# EAGLE board ledmatrix (EAGLE 6.5.0)

Size 160 x 100 mm. Coordinates in mm from the lower left corner, seen from the top.
Outline: 0,0 160,0 160,100 0,100 0,0
Copper layers (1*16): Top 0.035mm / dielectric 1.5mm / Bottom 0.035mm
Design rules "default": minimum track width 10mil, minimum drill 24mil, track to track 8mil, track to pad 8mil, pad to pad 8mil, via to via 8mil, smd to smd 8mil, copper to edge 40mil, drill to drill 8mil, minimum pad ring 10mil, minimum via ring 8mil, stop-mask expansion 4mil, vias tented up to drill 0mil, thermal gap 10mil

## Footprints (pad centres in the part's own frame; a part is rotated, then mirrored left to right if it is on the bottom)
LED5MM = drill 0.813 octagon: A -1.27,0; K 1.27,0
0204/7 = drill 0.813 octagon: 1 -3.81,0; 2 3.81,0
MA07-1 = drill 1.016 long: 1 -7.62,0; 2 -5.08,0; 3 -2.54,0; 4 0,0; 5 2.54,0; 6 5.08,0; 7 7.62,0
MA12-1 = drill 1.016 long: 1 -13.97,0; 2 -11.43,0; 3 -8.89,0; 4 -6.35,0; 5 -3.81,0; 6 -1.27,0; 7 1.27,0; 8 3.81,0; 9 6.35,0; 10 8.89,0; 11 11.43,0; 12 13.97,0
TO18 = drill 0.813 octagon: 1 -1.27,-1.27; 2 1.27,-1.27; 3 1.27,1.27

## Placement (x,y rotation side)
LED1  [LED5MM]  -73.66,72.39 0 top  (outside the outline)
LED2  [LED5MM]  -86.36,72.39 0 top  (outside the outline)
LED3  [LED5MM]  -99.06,72.39 0 top  (outside the outline)
LED4  [LED5MM]  -21.59,80.01 0 top  (outside the outline)
LED5  [LED5MM]  -34.29,80.01 0 top  (outside the outline)
LED6  [LED5MM]  -46.99,80.01 0 top  (outside the outline)
LED7  [LED5MM]  -59.69,80.01 0 top  (outside the outline)
LED8  [LED5MM]  -72.39,80.01 0 top  (outside the outline)
LED9  [LED5MM]  -85.09,80.01 0 top  (outside the outline)
LED10  [LED5MM]  -73.66,3.81 0 top  (outside the outline)
LED11  [LED5MM]  -60.96,72.39 0 top  (outside the outline)
LED12  [LED5MM]  -86.36,3.81 0 top  (outside the outline)
LED13  [LED5MM]  -99.06,3.81 0 top  (outside the outline)
LED14  [LED5MM]  -22.86,11.43 0 top  (outside the outline)
LED15  [LED5MM]  -35.56,11.43 0 top  (outside the outline)
LED16  [LED5MM]  -48.26,11.43 0 top  (outside the outline)
LED17  [LED5MM]  -60.96,11.43 0 top  (outside the outline)
LED18  [LED5MM]  -73.66,11.43 0 top  (outside the outline)
LED19  [LED5MM]  -86.36,11.43 0 top  (outside the outline)
LED20  [LED5MM]  -99.06,11.43 0 top  (outside the outline)
LED21  [LED5MM]  -22.86,19.05 0 top  (outside the outline)
LED22  [LED5MM]  -35.56,19.05 0 top  (outside the outline)
LED23  [LED5MM]  -48.26,19.05 0 top  (outside the outline)
LED24  [LED5MM]  -60.96,19.05 0 top  (outside the outline)
LED25  [LED5MM]  -73.66,19.05 0 top  (outside the outline)
LED26  [LED5MM]  -86.36,19.05 0 top  (outside the outline)
LED27  [LED5MM]  -99.06,19.05 0 top  (outside the outline)
LED28  [LED5MM]  -22.86,26.67 0 top  (outside the outline)
LED29  [LED5MM]  -35.56,26.67 0 top  (outside the outline)
LED30  [LED5MM]  -48.26,26.67 0 top  (outside the outline)
LED31  [LED5MM]  -60.96,26.67 0 top  (outside the outline)
LED32  [LED5MM]  -73.66,26.67 0 top  (outside the outline)
LED33  [LED5MM]  -86.36,26.67 0 top  (outside the outline)
LED34  [LED5MM]  -99.06,26.67 0 top  (outside the outline)
LED35  [LED5MM]  -22.86,34.29 0 top  (outside the outline)
LED36  [LED5MM]  -35.56,34.29 0 top  (outside the outline)
LED37  [LED5MM]  -48.26,34.29 0 top  (outside the outline)
LED38  [LED5MM]  -60.96,34.29 0 top  (outside the outline)
LED39  [LED5MM]  -73.66,34.29 0 top  (outside the outline)
LED40  [LED5MM]  -86.36,34.29 0 top  (outside the outline)
LED41  [LED5MM]  -99.06,34.29 0 top  (outside the outline)
LED42  [LED5MM]  -22.86,41.91 0 top  (outside the outline)
LED43  [LED5MM]  -35.56,41.91 0 top  (outside the outline)
LED44  [LED5MM]  -48.26,41.91 0 top  (outside the outline)
LED45  [LED5MM]  -60.96,41.91 0 top  (outside the outline)
LED46  [LED5MM]  -73.66,41.91 0 top  (outside the outline)
LED47  [LED5MM]  -86.36,41.91 0 top  (outside the outline)
LED48  [LED5MM]  -99.06,41.91 0 top  (outside the outline)
LED49  [LED5MM]  -22.86,49.53 0 top  (outside the outline)
LED50  [LED5MM]  -35.56,49.53 0 top  (outside the outline)
LED51  [LED5MM]  -48.26,49.53 0 top  (outside the outline)
LED52  [LED5MM]  -60.96,49.53 0 top  (outside the outline)
LED53  [LED5MM]  -73.66,49.53 0 top  (outside the outline)
LED54  [LED5MM]  -86.36,49.53 0 top  (outside the outline)
LED55  [LED5MM]  -99.06,49.53 0 top  (outside the outline)
LED56  [LED5MM]  -22.86,57.15 0 top  (outside the outline)
LED57  [LED5MM]  -35.56,57.15 0 top  (outside the outline)
LED58  [LED5MM]  -48.26,57.15 0 top  (outside the outline)
LED59  [LED5MM]  -60.96,57.15 0 top  (outside the outline)
LED60  [LED5MM]  -73.66,57.15 0 top  (outside the outline)
LED61  [LED5MM]  -86.36,57.15 0 top  (outside the outline)
LED62  [LED5MM]  -99.06,57.15 0 top  (outside the outline)
LED63  [LED5MM]  -22.86,64.77 0 top  (outside the outline)
LED64  [LED5MM]  -35.56,64.77 0 top  (outside the outline)
LED65  [LED5MM]  -48.26,64.77 0 top  (outside the outline)
LED66  [LED5MM]  -60.96,64.77 0 top  (outside the outline)
LED67  [LED5MM]  -73.66,64.77 0 top  (outside the outline)
LED68  [LED5MM]  -86.36,64.77 0 top  (outside the outline)
LED69  [LED5MM]  -99.06,64.77 0 top  (outside the outline)
LED70  [LED5MM]  -22.86,72.39 0 top  (outside the outline)
LED71  [LED5MM]  -35.56,72.39 0 top  (outside the outline)
LED72  [LED5MM]  -48.26,72.39 0 top  (outside the outline)
R1  [0204/7]  -31.75,91.44 0 top  (outside the outline)
R2  [0204/7]  -41.91,91.44 0 top  (outside the outline)
R3  [0204/7]  -52.07,91.44 0 top  (outside the outline)
R4  [0204/7]  -62.23,91.44 0 top  (outside the outline)
R5  [0204/7]  -72.39,91.44 0 top  (outside the outline)
R6  [0204/7]  -82.55,91.44 0 top  (outside the outline)
SV1  [MA07-1]  -54.61,3.81 0 top  (outside the outline)
SV2  [MA12-1]  17.78,5.08 0 top
T1  2N2222  [TO18]  -22.86,86.36 0 top  (outside the outline)

## Library data of the parts
LED1-LED72 = led
R1-R6 = eagle-ltspice; SPICEMODEL: NONE; SPICEPREFIX: R
SV1 SV2 = con-lstb; OC_FARNELL: unknown; OC_NEWARK: unknown
T1 = transistor

## Nets
COL12: SV2.12
N$1: LED12.K LED13.K LED36.K LED37.K LED60.K LED61.K T1.3
N$2: SV2.11
N$3: LED11.K LED14.K LED35.K LED38.K LED59.K LED62.K

## Tracks (layer width: path | path; a pad name or v marks a point on that pad's centre or on a via)
N$1  (6 unrouted)
N$3  (5 unrouted)